# Altium PCB PCB1.PcbDoc
Units mil, origin at the board's own origin, x right, y up, seen from the top; angles counter-clockwise.
Board outline 6000 x 4000 mil, 2 copper layers (Top Layer, Bottom Layer); 240 components, 205 nets, 755 pads, 0 vias.
Unrouted connection lines stored in the file: 517.
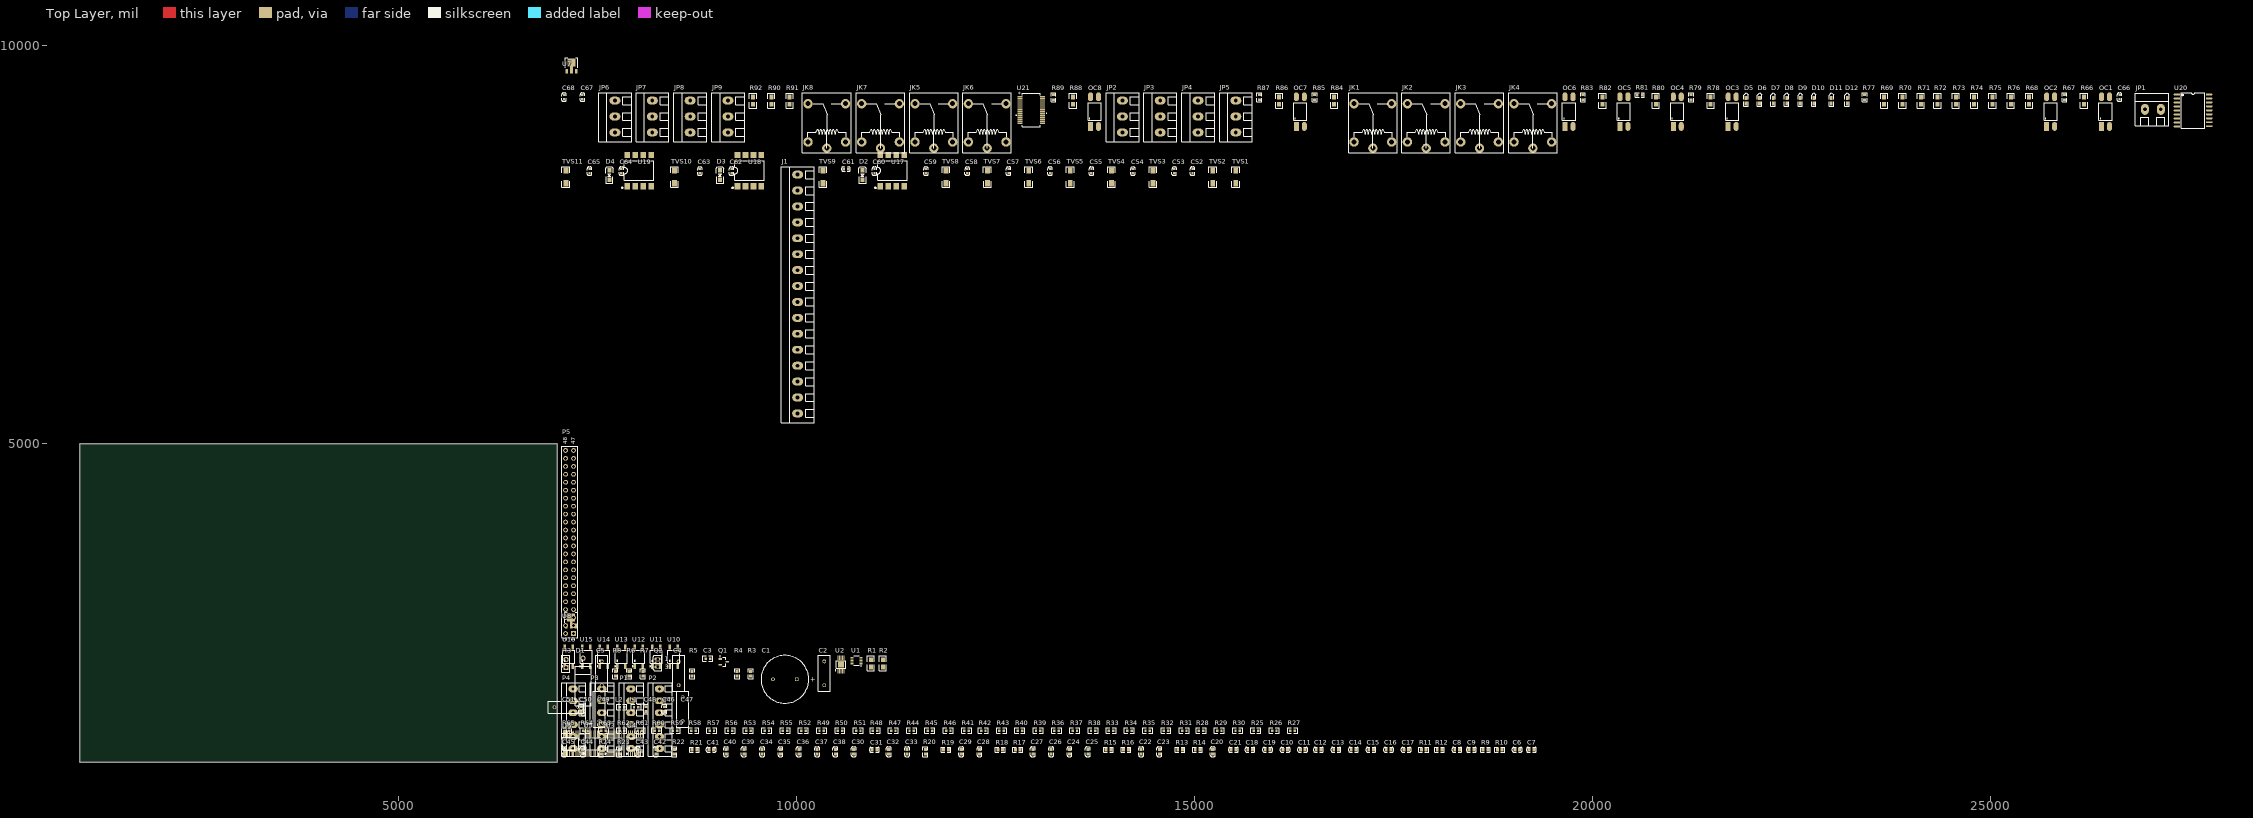
[diagram p0: Top Layer view]
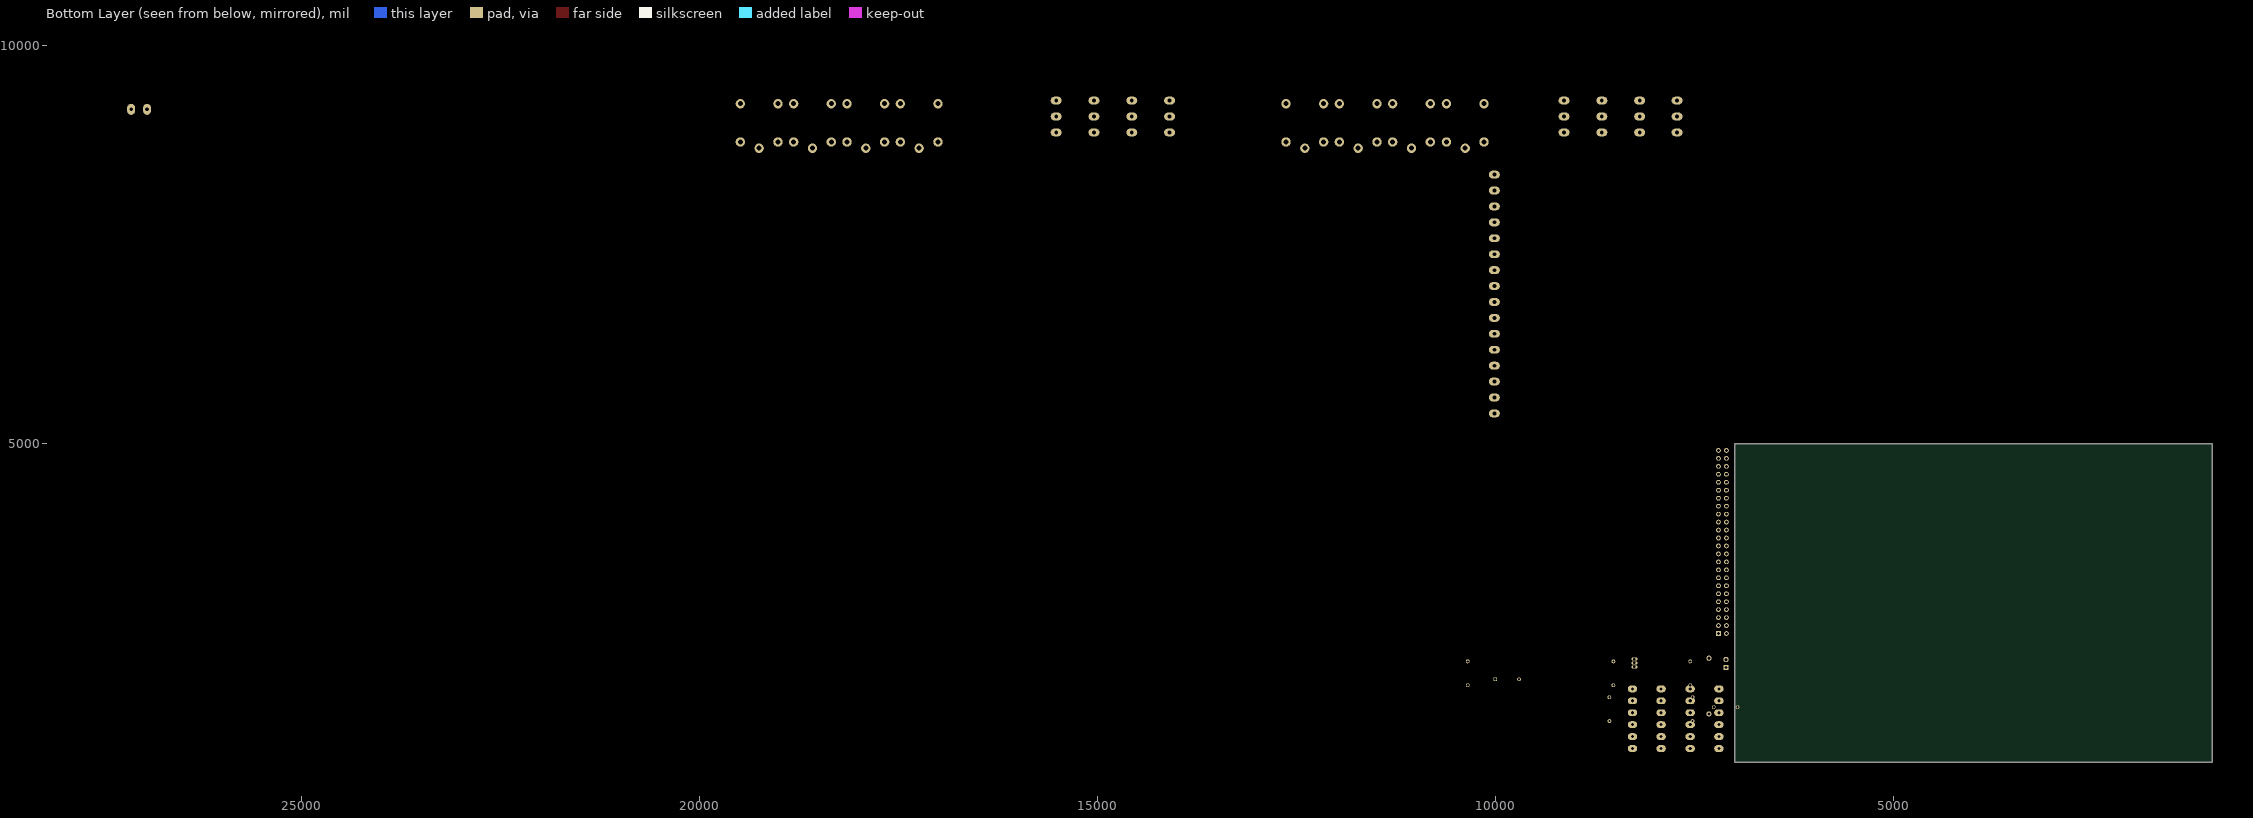
[diagram p1: Bottom Layer view, seen from below]

## Layer stack, top to bottom
Top Solder: solder mask 0.4, Solder Resist, Dk 3.5
Top Layer: signal copper 1.4
Dielectric 1: dielectric 12.6, FR-4, Dk 4.8
Bottom Layer: signal copper 1.4
Bottom Solder: solder mask 0.4, Solder Resist, Dk 3.5

## Board outline
1000,1000 7000,1000 7000,5000 1000,5000

## Design rules (kind name [scope] priority, off if disabled: settings)
Clearance [All] p1: gap=10 ignorepadtopadclearanceinfootprint=FALSE except(0: Arc-Hole Track-Hole SMDPad-Hole THPad-Hole Via-Hole Fill-Hole Poly-Hole Region-Hole Text-Hole)
PolygonConnect [All] p1: connectstyle=Relief reliefconductorwidth=10 reliefentries=4 polygonreliefangle="90 Angle" airgapwidth=10
RoomDefinition Power [InComponentClass('Power')] p1: confinementstyle=ConfineIn formatcopy=TRUE lockcomponents=FALSE outline 7045,9570 7190,9570 7190,9815 7045,9815
RoomDefinition DOut [InComponentClass('DOut')] p2: confinementstyle=ConfineIn formatcopy=TRUE lockcomponents=FALSE outline 7045,8640 27805,8640 27805,9520 7045,9520
RoomDefinition DIn [InComponentClass('DIn')] p3: confinementstyle=ConfineIn formatcopy=TRUE lockcomponents=FALSE outline 7045,5250 15695,5250 15695,8590 7045,8590
RoomDefinition Connect [InComponentClass('Connect')] p4: confinementstyle=ConfineIn formatcopy=TRUE lockcomponents=FALSE outline 7045,2500 7265,2500 7265,5195 7045,5195
RoomDefinition AD_DA [InComponentClass('AD_DA')] p5: confinementstyle=ConfineIn formatcopy=TRUE lockcomponents=FALSE outline 7045,1560 11165,1560 11165,2450 7045,2450
RoomDefinition AD7799 [InComponentClass('AD7799')] p6: confinementstyle=ConfineIn formatcopy=TRUE lockcomponents=FALSE outline 7045,1055 8100,1055 8100,1510 7045,1510
RoutingVias [All] p1: holewidth=28 width=50 viastyle="Through Hole" minholewidth=28 minwidth=50 maxholewidth=28 maxwidth=50
SolderMaskExpansion [All] p1: expansion=4 istentingtop=FALSE
Width [All] p1: maxlimit=10 minlimit=10 preferedwidth=10
30 further rules are at their usual default settings.

## Classes and differential pairs
component class Power: C46 C47 C48 C49 C50 C51 L1 L2 U7 U8
component class DOut: C66 C67 C68 D5 D6 D7 D8 D9 D10 D11 D12 JK1 JK2 JK3 JK4 JK5 JK6 JK7 JK8 JP1 JP2 JP3 JP4 JP5 JP6 JP7 JP8 JP9 OC1 OC2 OC3 OC4 OC5 OC6 OC7 OC8 R66 R67 R68 R69 R70 R71 R72 R73 R74 R75 R76 R77 R78 R79 R80 R81 R82 R83 R84 R85 R86 R87 R88 R89 R90 R91 R92 U20 U21
component class DIn: C52 C53 C54 C55 C56 C57 C58 C59 C60 C61 C62 C63 C64 C65 D2 D3 D4 J1 R25 R26 R27 R28 R29 R30 R31 R32 R33 R34 R35 R36 R37 R38 R39 R40 R41 R42 R43 R44 R45 R46 R47 R48 R49 R50 R51 R52 R53 R54 R55 R56 R57 R58 R59 R60 R61 R62 R63 R64 R65 TVS1 TVS2 TVS3 TVS4 TVS5 TVS6 TVS7 TVS8 TVS9 TVS10 TVS11 U9 U10 U11 U12 U13 U14 U15 U16 U17 U18 U19
component class Connect: P5
component class AD_DA: C1 C2 C3 C4 C5 D1 H3 Q1 Q2 R1 R2 R3 R4 R5 R6 R7 R8 U1 U2
component class AD7799: C6 C7 C8 C9 C10 C11 C12 C13 C14 C15 C16 C17 C18 C19 C20 C21 C22 C23 C24 C25 C26 C27 C28 C29 C30 C31 C32 C33 C34 C35 C36 C37 C38 C39 C40 C41 C42 C43 C44 C45 P1 P2 P3 P4 R9 R10 R11 R12 R13 R14 R15 R16 R17 R18 R19 R20 R21 R22 R23 R24 U3 U4 U5 U6

## Components (designator, comment, footprint, x,y, rotation, side; value= is the part's Value field where it differs from the comment)
C1 "10uf/30V" RB7.6-15 9860,2040 r0 top value=100pF
C2 "104" RAD-0.3 10355,2115 r90 top value=100pF
C3 "130nF" 0603 8865,2300 r0 top
C4 "IUF" RAD-0.3 8525,2115 r90 top value=100pF
C5 "10NF" RAD-0.3 7560,2115 r90 top value=100pF
C6 "CAP" 0603_C 19060,1155 r0 top
C7 "CAP" 0603_C 19240,1155 r0 top
C8 "100nF" 0603_C 18305,1155 r0 top
C9 "100nF" 0603_C 18485,1155 r0 top
C10 "100nF" 0603_C 16145,1155 r0 top
C11 "100nF" 0603_C 16365,1155 r0 top
C12 "100nF" 0603_C 16565,1155 r0 top
C13 "100nF" 0603_C 16785,1155 r0 top
C14 "100nF" 0603_C 17005,1155 r0 top
C15 "100nF" 0603_C 17225,1155 r0 top
C16 "100nF" 0603_C 17445,1155 r0 top
C17 "100nF" 0603_C 17665,1155 r0 top
C18 "CAP" 0603_C 15705,1155 r0 top
C19 "CAP" 0603_C 15925,1155 r0 top
C20 "CAP" 0603_C 15235,1130 r90 top
C21 "CAP" 0603_C 15495,1155 r0 top
C22 "100nF" 0603_C 14335,1130 r90 top
C23 "100nF" 0603_C 14565,1130 r90 top
C24 "CAP" 0603_C 13435,1130 r90 top
C25 "CAP" 0603_C 13665,1130 r90 top
C26 "CAP" 0603_C 13205,1130 r90 top
C27 "CAP" 0603_C 12975,1130 r90 top
C28 "100nF" 0603_C 12305,1130 r90 top
C29 "100nF" 0603_C 12075,1130 r90 top
C30 "100nF" 0603_C 10725,1130 r90 top
C31 "100nF" 0603_C 10985,1155 r0 top
C32 "100nF" 0603_C 11165,1130 r90 top
C33 "100nF" 0603_C 11395,1130 r90 top
C34 "CAP" 0603_C 9575,1130 r90 top
C35 "100nF" 0603_C 9805,1130 r90 top
C36 "100nF" 0603_C 10035,1130 r90 top
C37 "100nF" 0603_C 10265,1130 r90 top
C38 "100nF" 0603_C 10495,1130 r90 top
C39 "CAP" 0603_C 9345,1130 r90 top
C40 "CAP" 0603_C 9120,1130 r90 top
C41 "CAP" 0603_C 8935,1155 r0 top
C42 "100nF" 0603_C 8240,1130 r90 top
C43 "100nF" 0603_C 8010,1130 r90 top
C44 "CAP" 0603_C 7320,1130 r90 top
C45 "CAP" 0603_C 7090,1130 r90 top
C46 "6.3V 470uF" 0603_C 8345,1665 r90 top
C47 "104" RAD-0.3 8575,1665 r90 top value=100pF
C48 "6.3V 470uF" 0603_C 8115,1665 r90 top
C49 "104" RAD-0.3 7530,1665 r90 top value=100pF
C50 "6.3V 470uF" 0603_C 7300,1665 r90 top
C51 "104" RAD-0.3 7115,1690 r0 top value=100pF
C52 "100nF" 0603C 14980,8395 r90 top value=104
C53 "100nF" 0603C 14750,8395 r90 top value=104
C54 "100nF" 0603C 14230,8395 r90 top value=104
C55 "100nF" 0603C 13710,8395 r90 top value=104
C56 "100nF" 0603C 13190,8395 r90 top value=104
C57 "100nF" 0603C 12670,8395 r90 top value=104
C58 "100nF" 0603C 12150,8395 r90 top value=104
C59 "100nF" 0603C 11630,8395 r90 top value=104
C60 "100nF" 0603C 10985,8395 r90 top value=104
C61 "100nF" 0603C 10600,8450 r0 top value=104
C62 "100nF" 0603C 9190,8395 r90 top value=104
C63 "100nF" 0603C 8790,8395 r90 top value=104
C64 "100nF" 0603C 7805,8395 r90 top value=104
C65 "100nF" 0603C 7405,8395 r90 top value=104
C66 "100nF" 0603C 26625,9325 r90 top value=104
C67 "100nF" 0603C 7315,9325 r90 top value=104
C68 "100nF" 0603C 7085,9325 r90 top value=104
D1 "SS14" DIODE-0.7 7325,1955 r90 top
D2 "DIODE" 贴片二极管 10835,8315 r90 top
D3 "DIODE" 贴片二极管 9045,8315 r90 top
D4 "DIODE" 贴片二极管 7655,8315 r90 top
D5 "LED" LED-0603G 21935,9275 r90 top
D6 "LED" LED-0603G 22105,9275 r90 top
D7 "LED" LED-0603G 22275,9275 r90 top
D8 "LED" LED-0603G 22445,9275 r90 top
D9 "LED" LED-0603G 22615,9275 r90 top
D10 "LED" LED-0603G 22785,9275 r90 top
D11 "LED" LED-0603G 23005,9275 r90 top
D12 "LED" LED-0603G 23205,9275 r90 top
H3 "KH-2.54PH180-1X2P-L11.5" 1*2P 7160,2130 r90 top
J1 "PIN16" KF128-5.08-16P 10020,6880 r90 top
JK1 "SRD-05VDC-SL-C" SRD-C_B 17010,8790 r90 top
JK2 "SRD-05VDC-SL-C" SRD-C_B 17680,8790 r90 top
JK3 "SRD-05VDC-SL-C" SRD-C_B 18350,8790 r90 top
JK4 "SRD-05VDC-SL-C" SRD-C_B 19020,8790 r90 top
JK5 "SRD-05VDC-SL-C" SRD-C_B 11495,8790 r90 top
JK6 "SRD-05VDC-SL-C" SRD-C_B 12165,8790 r90 top
JK7 "SRD-05VDC-SL-C" SRD-C_B 10825,8790 r90 top
JK8 "SRD-05VDC-SL-C" SRD-C_B 10150,8790 r90 top
JP1 "HF9500*2" KF128-5.08-2P 26945,9200 r0 top
JP2 "KF128-5.08-3P" KF128-5.08-3P 14100,8910 r90 top
JP3 "KF128-5.08-3P" KF128-5.08-3P 14575,8910 r90 top
JP4 "KF128-5.08-3P" KF128-5.08-3P 15050,8910 r90 top
JP5 "KF128-5.08-3P" KF128-5.08-3P 15525,8910 r90 top
JP6 "KF128-5.08-3P" KF128-5.08-3P 7725,8910 r90 top
JP7 "KF128-5.08-3P" KF128-5.08-3P 8195,8910 r90 top
JP8 "KF128-5.08-3P" KF128-5.08-3P 8670,8910 r90 top
JP9 "KF128-5.08-3P" KF128-5.08-3P 9145,8910 r90 top
L1 "60R" 0603 7965,1690 r0 top
L2 "60R" 0603 7785,1690 r0 top
OC1 "EL817A" SMD_PC817 26400,8985 r90 top
OC2 "EL817A" SMD_PC817 25710,8985 r90 top
OC3 "EL817A" SMD_PC817 21710,8985 r90 top
OC4 "EL817A" SMD_PC817 21020,8985 r90 top
OC5 "EL817A" SMD_PC817 20350,8985 r90 top
OC6 "EL817A" SMD_PC817 19660,8985 r90 top
OC7 "EL817A" SMD_PC817 16285,8985 r90 top
OC8 "EL817A" SMD_PC817 13700,8985 r90 top
P1 "CON6" KF128-3.81-6P 7925,1545 r90 top
P2 "CON6" KF128-3.81-6P 8285,1545 r90 top
P3 "CON6" KF128-3.81-6P 7560,1545 r90 top
P4 "CON6" KF128-3.81-6P 7200,1545 r90 top
P5 "Header 24X2" HDR2X24 7205,2615 r90 top
Q1 "SS8550" SOT-23B_N 9090,2260 r0 top
Q2 "SI2309" E3 8260,2245 r0 top
R1 "500R" 0805R 10940,2185 r90 top value=1K
R2 "500R" 0805R 11090,2185 r90 top value=1K
R3 "15R" 0603_R 9430,2110 r90 top value=1K
R4 "10K" 0603_R 9260,2110 r90 top value=1K
R5 "5.6K/1%" 0603_R 8695,2110 r90 top value=1K
R6 "8.2K/1%" 0603_R 7905,2110 r90 top value=1K
R7 "2K/1%" 0603_R 8075,2110 r90 top value=1K
R8 "15R" 0603_R 7730,2110 r90 top value=1K
R9 "0R" 0603_R 18660,1155 r0 top
R10 "0R" 0603_R 18840,1155 r0 top
R11 "0R" 0603_R 17885,1155 r0 top
R12 "0R" 0603_R 18085,1155 r0 top
R13 "0R" 0603_R 14825,1155 r0 top
R14 "0R" 0603_R 15045,1155 r0 top
R15 "0R" 0603_R 13925,1155 r0 top
R16 "0R" 0603_R 14145,1155 r0 top
R17 "0R" 0603_R 12785,1155 r0 top
R18 "0R" 0603_R 12565,1155 r0 top
R19 "0R" 0603_R 11885,1155 r0 top
R20 "0R" 0603_R 11625,1130 r90 top
R21 "0R" 0603_R 8725,1155 r0 top
R22 "0R" 0603_R 8470,1130 r90 top
R23 "0R" 0603_R 7780,1130 r90 top
R24 "0R" 0603_R 7550,1130 r90 top
R25 "10K" 0603 15750,1395 r0 top
R26 "10K" 0603 15980,1395 r0 top
R27 "10K" 0603 16210,1395 r0 top
R28 "10K" 0603 15060,1395 r0 top
R29 "10K" 0603 15290,1395 r0 top
R30 "10K" 0603 15520,1395 r0 top
R31 "10K" 0603 14850,1395 r0 top
R32 "10K" 0603 14620,1395 r0 top
R33 "10K" 0603 13930,1395 r0 top
R34 "10K" 0603 14160,1395 r0 top
R35 "10K" 0603 14390,1395 r0 top
R36 "10K" 0603 13245,1395 r0 top
R37 "10K" 0603 13475,1395 r0 top
R38 "10K" 0603 13705,1395 r0 top
R39 "10K" 0603 13015,1395 r0 top
R40 "10K" 0603 12785,1395 r0 top
R41 "10K" 0603 12115,1395 r0 top
R42 "10K" 0603 12325,1395 r0 top
R43 "10K" 0603 12555,1395 r0 top
R44 "10K" 0603 11425,1395 r0 top
R45 "10K" 0603 11655,1395 r0 top
R46 "10K" 0603 11885,1395 r0 top
R47 "10K" 0603 11195,1395 r0 top
R48 "10K" 0603 10965,1395 r0 top
R49 "10K" 0603 10295,1395 r0 top
R50 "10K" 0603 10525,1395 r0 top
R51 "10K" 0603 10755,1395 r0 top
R52 "10K" 0603 10065,1395 r0 top
R53 "10K" 0603 9375,1395 r0 top
R54 "10K" 0603 9605,1395 r0 top
R55 "10K" 0603 9835,1395 r0 top
R56 "10K" 0603 9145,1395 r0 top
R57 "10K" 0603 8915,1395 r0 top
R58 "10K" 0603 8685,1395 r0 top
R59 "10K" 0603 8455,1395 r0 top
R60 "10K" 0603 8225,1395 r0 top
R61 "10K" 0603 8015,1395 r0 top
R62 "10K" 0603 7785,1395 r0 top
R63 "10K" 0603 7555,1395 r0 top
R64 "10K" 0603 7325,1395 r0 top
R65 "10K" 0603 7095,1395 r0 top
R66 "500R" 0805R 26180,9255 r90 top value=1K
R67 "4.7K" 0603R 25935,9320 r90 top value=1K
R68 "500R" 0805R 25490,9255 r90 top value=1K
R69 "680R" 0805R 23670,9255 r90 top value=1K
R70 "680R" 0805R 23900,9255 r90 top value=1K
R71 "680R" 0805R 24130,9255 r90 top value=1K
R72 "680R" 0805R 24340,9255 r90 top value=1K
R73 "680R" 0805R 24570,9255 r90 top value=1K
R74 "680R" 0805R 24800,9255 r90 top value=1K
R75 "680R" 0805R 25030,9255 r90 top value=1K
R76 "680R" 0805R 25260,9255 r90 top value=1K
R77 "4.7K" 0603R 23425,9320 r90 top value=1K
R78 "500R" 0805R 21490,9255 r90 top value=1K
R79 "4.7K" 0603R 21245,9320 r90 top value=1K
R80 "500R" 0805R 20800,9255 r90 top value=1K
R81 "4.7K" 0603R 20570,9380 r0 top value=1K
R82 "500R" 0805R 20130,9255 r90 top value=1K
R83 "4.7K" 0603R 19885,9320 r90 top value=1K
R84 "500R" 0805R 16760,9255 r90 top value=1K
R85 "4.7K" 0603R 16515,9320 r90 top value=1K
R86 "500R" 0805R 16070,9255 r90 top value=1K
R87 "4.7K" 0603R 15820,9320 r90 top value=1K
R88 "500R" 0805R 13480,9255 r90 top value=1K
R89 "4.7K" 0603R 13235,9320 r90 top value=1K
R90 "500R" 0805R 9690,9255 r90 top value=1K
R91 "500R" 0805R 9920,9255 r90 top value=1K
R92 "500R" 0805R 9460,9255 r90 top value=1K
TVS1 "TVS" TVS 15475,8220 r90 top
TVS2 "TVS" TVS 15185,8220 r90 top
TVS3 "TVS" TVS 14435,8220 r90 top
TVS4 "TVS" TVS 13915,8220 r90 top
TVS5 "TVS" TVS 13395,8220 r90 top
TVS6 "TVS" TVS 12875,8220 r90 top
TVS7 "TVS" TVS 12355,8220 r90 top
TVS8 "TVS" TVS 11835,8220 r90 top
TVS9 "TVS" TVS 10290,8220 r90 top
TVS10 "TVS" TVS 8425,8220 r90 top
TVS11 "TVS" TVS 7060,8220 r90 top
U1 "MCP4725" MCP4725 10705,2220 r0 top
U2 "XTR111" XTR111 10495,2155 r0 top
U3 "AD7799" TSSOP16 7625,1105 r90 top
U4 "AD7799" TSSOP16 7895,1105 r90 top
U5 "AD7799" TSSOP16 7350,1105 r90 top
U6 "AD7799" TSSOP16 7080,1105 r90 top
U7 "HT7533-1" SOT89 7120,9680 r0 top
U8 "HT7533-1" SOT89 7115,2710 r0 top
U9 "IS181GB" TLP181 7225,1150 r90 top
U10 "IS181GB" TLP181 8545,2245 r90 top
U11 "IS181GB" TLP181 8325,2245 r90 top
U12 "IS181GB" TLP181 8105,2245 r90 top
U13 "IS181GB" TLP181 7885,2245 r90 top
U14 "IS181GB" TLP181 7665,2245 r90 top
U15 "IS181GB" TLP181 7445,2245 r90 top
U16 "IS181GB" TLP181 7225,2245 r90 top
U17 "PS8601" SMD-8_6.3mm 11210,8430 r0 top
U18 "PS8601" SMD-8_6.3mm 9415,8430 r0 top
U19 "PS8601" SMD-8_6.3mm 8030,8430 r0 top
U20 "ULN2803A" "SOP18 - 300mil" 27345,9385 r0 top
U21 "MCP23017-E/SS" SSOP28_MC_MCH 12955,9190 r0 top

## Footprints (in the part's own frame and the unit in brackets; to place one, negate y for a bottom-side part, rotate by r counter-clockwise, add the part's x,y. Pads: shape width x height; smd on the part's side, far side on the other; paste and mask are expansions set on the pad)
1*2P [mm]
  rect 1.7x1.7 hole 1.1: 1(1.48,1.27)
  round 1.7 hole 1.1: 2(4.02,1.27)
  silkscreen extent 0,0 5.33,2.54
0603 [mil]
  rect 30x30 smd: 1(0,0) 2(55,0)
  silkscreen extent -35,-35 90,35
0603_C [mm]
  rect 0.93x0.98 smd: 1(-0.77,0) 2(0.77,0)
  silkscreen extent -1.53,-0.79 1.54,0.79, body extent -0.8,-0.4 0.8,0.4, height 0.3
0603_R [mm]
  rect 0.93x0.98 smd: 1(-0.77,0) 2(0.77,0)
  silkscreen extent -1.53,-0.79 1.54,0.79, body extent -0.85,-0.4 0.85,0.4, height 0.56
0603C [mil]
  rect 30x30 smd: 1(0.21,-0.35) 2(55.21,-1.35)
  silkscreen extent -26,-30 81,28, body extent -1,-15 62,17, height 12
0603R [mm]
  rect 0.8x0.965 smd: 1(0,0) 2(1.6,0)
  silkscreen extent -0.64,-0.76 2.21,0.76, body extent -0.04,-0.41 1.56,0.41, height 0.45
0805R [mil]
  rect 60x50 smd: 1(10,0) 2(100,0)
  silkscreen extent -40,-45 150,45, body extent 11,-25 90,25, height 15
DIODE-0.7 [mm] "Diode, Thru-Hole; 2 Leads; 0.7 in Pin Spacing"
  round 1.65 hole 1: 1(-8.89,0) 2(8.89,0)
  silkscreen extent -7.37,-2.54 7.37,2.54
E3 [mm] "TO, Flat Index; 3 In-Line, Axial Leads; Body Dia. 4.6mm; Lead Dia. 0.5 mm (max)"
  oval 2x1 hole 0.8: 1(0,1.27) 2(0,0) 3(0,-1.27)
  silkscreen extent -1.41,-2.41 1.41,2.41
HDR2X24 [mm] "Connector; Header; 24x2 Position"
  rect 1.5x1.5 hole 0.9: 1(0,0)
  round 1.5 hole 0.9: 2(0,2.54) 3(2.54,0) 4(2.54,2.54) 5(5.08,0) 6(5.08,2.54) 7(7.62,0) 8(7.62,2.54) 9(10.16,0) 10(10.16,2.54) 11(12.7,0) 12(12.7,2.54) 13(15.24,0) 14(15.24,2.54) 15(17.78,0) 16(17.78,2.54) 17(20.32,0) 18(20.32,2.54) 19(22.86,0) 20(22.86,2.54) 21(25.4,0) 22(25.4,2.54) 23(27.94,0) 24(27.94,2.54) 25(30.48,0) 26(30.48,2.54) 27(33.02,0) 28(33.02,2.54) 29(35.56,0) 30(35.56,2.54) 31(38.1,0) 32(38.1,2.54) 33(40.64,0) 34(40.64,2.54) 35(43.18,0) 36(43.18,2.54) 37(45.72,0) 38(45.72,2.54) 39(48.26,0) 40(48.26,2.54) 41(50.8,0) 42(50.8,2.54) 43(53.34,0) 44(53.34,2.54) 45(55.88,0) 46(55.88,2.54) 47(58.42,0) 48(58.42,2.54)
  silkscreen extent -1.27,-1.27 59.69,3.81
KF128-3.81-6P [mm] "螺钉式接线端子，脚距3.81mm"
  oval 2.2x3 hole 1: 1(-9.525,0) 2(-5.715,0) 3(-1.905,0) 4(1.905,0) 5(5.715,0) 6(9.525,0)
  silkscreen extent -11.94,-4.04 11.43,3.63, body extent -11.93,-3.9 11.43,3.5, height 8.55
KF128-5.08-2P [mm]
  oval 2.5x3.5 hole 1.2: 1(0,0) 2(5.08,0)
  silkscreen extent -3.05,-5.31 7.62,5.21, body extent -3.05,-5.38 7.61,5.12, height 14.15
KF128-5.08-3P [mm]
  oval 2.5x3.5 hole 1.2: 1(0,0) 2(5.08,0) 3(10.16,0)
  silkscreen extent -3.05,-5.31 12.7,5.21, body extent -3.05,-5.38 12.69,5.12, height 14.15
KF128-5.08-16P [mm]
  oval 2.5x3.5 hole 1.2: 1(-38.1,0) 2(-33.02,0) 3(-27.94,0) 4(-22.86,0) 5(-17.78,0) 6(-12.7,0) 7(-7.62,0) 8(-2.54,0) 9(2.54,0) 10(7.62,0) 11(12.7,0) 12(17.78,0) 13(22.86,0) 14(27.94,0) 15(33.02,0) 16(38.1,0)
  silkscreen extent -41.15,-5.31 40.64,5.21, body extent -41.14,-5.3 40.64,5.2, height 14.15
LED-0603G [mil]
  rect 50x35 smd: 1(0,0.26) 2(70,0.26)
  silkscreen extent -36,-28 134,28, body extent 4,-15 66,17, height 24
MCP4725 [mm]
  rect 1x0.55 smd: 1(2.792,0.447) 2(2.792,1.397) 3(2.792,2.347) 4(-0.008,2.347) 5(-0.008,1.397) 6(-0.008,0.447)
  silkscreen extent 0.49,-0.38 2.92,2.95
RAD-0.3 [mm] "Radial Cap, Thru-Hole; 2 Leads; 0.3 in Pin Spacing"
  round 1.2 hole 0.7: 1(-3.81,0) 2(3.81,0)
  silkscreen extent -5.71,-1.91 5.71,1.91
RB7.6-15 [mm] "Polarized Capacitor (Radial); 2 Leads"
  rect 1.2x1.2 hole 0.7: 1(3.81,0)
  round 1.2 hole 0.7: 2(-3.81,0)
  silkscreen extent -7.62,-7.62 7.62,7.62
SMD-8_6.3mm [mm]
  rect 1.8x2 smd: 1(-3.81,-4.95) 2(-1.27,-4.95) 3(1.27,-4.95) 4(3.81,-4.95) 5(3.81,4.95) 6(1.27,4.95) 7(-1.27,4.95) 8(-3.81,4.95)
  silkscreen extent -5.6,-5.7 4.7,3.1
SMD_PC817 [mm]
  rect 2.8x1.6 smd mask+0: 1(0,0)
  oval 2.8x1.6 smd mask+0: 2(0,-2.54) 3(9.452,-2.54) 4(9.452,0)
  silkscreen extent 2.03,-3.36 7.49,0.82, body extent -0.3,-3.56 9.7,1.02, height 3.85
"SOP18 - 300mil" [mm]
  oval 2.1x0.6 smd: 1(0.046,0) 2(0.046,-1.27) 3(0.046,-2.54) 4(0.046,-3.81) 5(0.046,-5.08) 6(0.046,-6.35) 7(0.046,-7.62) 8(0.046,-8.89) 9(0.046,-10.16) 10(10.317,-10.109) 11(10.317,-8.839) 12(10.317,-7.569) 13(10.317,-6.299) 14(10.317,-5.029) 15(10.317,-3.759) 16(10.317,-2.489) 17(10.317,-1.219) 18(10.317,0.051)
  silkscreen extent 1.4,-10.72 8.9,0.56
SOT89 [mil]
  rect 34x59.05 smd: 1(0,0) 3(120,0)
  rect 98.42x98.42 smd: 2(59.06,106.3)
  rect 34x100 smd: 2(60,20)
  silkscreen extent -20,40 140,170
SOT-23B_N [mm] "SOT23, 3-Leads, Body 2.9x1.3mm, Pitch 0.95mm, Lead Span 2.4mm, IPC Medium Density"
  rect 1.15x0.6 smd: 1(-1.125,0.95) 2(-1.125,-0.95) 3(1.125,0)
  silkscreen extent -1.25,-1.5 0.7,1.92, body extent -0.7,-1.5 0.7,1.5, height 1.14
SRD-C_B [mm]
  round 3 hole 1.6: 1(0,0) 2(0,-12) 3(-2,-6) 4(12.2,0) 5(12.2,-12)
  silkscreen extent -3.4,-13.75 15.7,1.75, body extent -3.33,-13.85 15.77,1.65, height 15.6
SSOP28_MC_MCH [mil]
  rect 65.18x17 smd paste+0 mask+0: 1(-142.83,166.34) 2(-142.83,140.75) 3(-142.83,115.16) 4(-142.83,89.57) 5(-142.83,63.98) 6(-142.83,38.39) 7(-142.83,12.8) 8(-142.83,-12.8) 9(-142.83,-38.39) 10(-142.83,-63.98) 11(-142.83,-89.57) 12(-142.83,-115.16) 13(-142.83,-140.75) 14(-142.83,-166.34) 15(142.83,-166.34) 16(142.83,-140.75) 17(142.83,-115.16) 18(142.83,-89.57) 19(142.83,-63.98) 20(142.83,-38.39) 21(142.83,-12.8) 22(142.83,12.8) 23(142.83,38.39) 24(142.83,63.98) 25(142.83,89.57) 26(142.83,115.16) 27(142.83,140.75) 28(142.83,166.34)
  silkscreen extent -195,-212 195,212, body extent -161,-207 161,207, height 79
TLP181 [mm]
  rect 1.56x0.8 smd: 1(-1.062,3.297) 2(-1.062,0.757) 3(5.098,0.757) 4(5.098,3.297)
  silkscreen extent -1.21,0.08 4.09,4.18
TSSOP16 [mm]
  rect 2x0.28 smd: 1(0,0) 2(0,-0.65) 3(0,-1.3) 4(0,-1.95) 5(0,-2.6) 6(0,-3.25) 7(0,-3.9) 8(0,-4.55) 9(6.4,-4.55) 10(6.4,-3.9) 11(6.4,-3.25) 12(6.4,-2.6) 13(6.4,-1.95) 14(6.4,-1.3) 15(6.4,-0.65) 16(6.4,0)
  silkscreen extent -0.3,-4.87 5.06,0.6
TVS [mil]
  rect 80x60 smd: 1(212,-49) 2(49.56,-49.51)
  silkscreen extent 0,-97 260,1
XTR111 [mm]
  rect 0.3x1.45 smd: 1(0.773,-0.418) 2(1.273,-0.418) 3(1.773,-0.418) 4(2.273,-0.418) 5(2.774,-0.418) 6(2.774,3.984) 7(2.273,3.984) 8(1.773,3.984) 9(1.273,3.984) 10(0.773,3.984)
  rect 1.89x1.83 smd: 11(1.772,1.783)
  silkscreen extent -0.13,-0.12 3.27,2.98
贴片二极管 [mil]
  rect 60x50 smd: 1(120,0) 2(0,0)
  silkscreen extent -42,-46 162,47

## Part data
C1: library part "Cap Pol1", "Polarized Capacitor (Radial)", LatestRevisionDate=17-Jul-2002, LatestRevisionNote="Re-released for DXP Platform.", PackageDescription="Polarized Capacitor (Radial); 2 Leads", PackageReference=RB7.6-15, Published=8-Jun-2000, Publisher="Altium Limited"
C2 C4 C5: library part Cap, "Capacitor", LatestRevisionDate=17-Jul-2002, LatestRevisionNote="Re-released for DXP Platform.", PackageDescription="Radial Cap, Thru-Hole; 2 Leads; 0.3 in Pin Spacing", PackageReference=RAD-0.3, Published=8-Jun-2000, Publisher="Altium Limited"
C3: library part "Cap Smd", "Capacitor"
C6 C7 C18 C19 C20 C21 C24 C25 C26 C27 C34 C39 C40 C41 C44 C45: "Capacitor"
C8 C9 C10 C11 C12 C13 C14 C15 C16 C17 C22 C23 C28 C29 C30 C31 C32 C33 C35 C36 C37 C38 C42 C43 C47 C49 C51 C52 C53 C54 C55 C56 C57 C58 C59 C60 C61 C62 C63 C64 C65 C66 C67 C68: library part CAP, "Capacitor"
  C47 C49 C51: LatestRevisionDate=17-Jul-2002, LatestRevisionNote="Re-released for DXP Platform.", PackageDescription="Radial Cap, Thru-Hole; 2 Leads; 0.3 in Pin Spacing", PackageReference=RAD-0.3, Published=8-Jun-2000, Publisher="Altium Limited"
  C52 C53 C54 C55 C56 C57 C58 C59 C60 C61 C62 C63 C64 C65 C66 C67 C68: LatestRevisionDate=17-Jul-2002, LatestRevisionNote="Re-released for DXP Platform.", PackageReference=RAD-0.3, Published=8-Jun-2000, Publisher="Altium Limited"
C46 C48 C50: library part ELECTRO1, "Electrolytic Capacitor"
D1: library part "D Zener", "Zener Diode", LatestRevisionDate=17-Jul-2002, LatestRevisionNote="Re-released for DXP Platform.", PackageDescription="Diode, Thru-Hole; 2 Leads; 0.7 in Pin Spacing", PackageReference=DIODE-0.7, Published=8-Jun-2000, Publisher="Altium Limited"
D2 D3 D4: "Diode"
D5 D6 D7 D8 D9 D10 D11 D12: "LED 发光二极管"
H3: BOM_Manufacturer=kinghelm(金航标), BOM_Manufacturer Part=KH-2.54PH180-1X4P-L11.5, BOM_Supplier=LCSC, BOM_Supplier Part=C2905435, Contributor=LCSC, spicePre=H, spiceSymbolName=KH-2.54PH180-1X4P-L11.5
JK1 JK2 JK3 JK4 JK5 JK6 JK7 JK8: "5V一组转换"
JP1: library part "HEADER 2"
JP2 JP3 JP4 JP5 JP6 JP7 JP8 JP9: library part "HEADER 3"
L1 L2: library part FUSE1, "Fuse"
OC1 OC2 OC3 OC4 OC5 OC6 OC7 OC8: library part EL357N, "线性光耦"
P1 P2 P3 P4: "Connector"
P5: "Header, 24-Pin, Dual row", LatestRevisionDate=17-Jul-2002, LatestRevisionNote="Re-released for DXP Platform.", Publisher="Altium Limited"
Q1: library part PNP, "PNP Bipolar Transistor", LatestRevisionDate=29-May-2009, LatestRevisionNote="IPC-7351 Footprint Added.", PackageDescription="3-Pin SOT-23 Package 0.95 mm Pitch, 2.4 mm Lead Span", PackageReference=SOT-23B, PackageVersion=Aug-1999, Published=8-Jun-2000, Publisher="Altium Limited"
Q2: library part MOSFET-P, "P-Channel MOSFET", LatestRevisionDate=17-Jul-2002, LatestRevisionNote="Re-released for DXP Platform.", PackageDescription="TO, Flat Index; 3 In-Line, Axial Leads; Body Dia. 4.6mm; Lead Dia. 0.5 mm (max)", PackageReference=E3, PackageVersion=1995/1996, Published=8-Jun-2000, Publisher="Altium Limited"
R1 R2 R66 R67 R68 R69 R70 R71 R72 R73 R74 R75 R76 R77 R78 R79 R80 R81 R82 R83 R84 R85 R86 R87 R88 R89 R90 R91 R92: library part RES, "Resistor", Published=8-Jun-2000, Publisher="Altium Limited", Revision="July-2002: Re-released for DXP Platform."
R3 R4 R5 R6 R7 R8: library part Res2, "Resistor", LatestRevisionDate=17-Jul-2002, LatestRevisionNote="Re-released for DXP Platform.", PackageDescription="Axial Device, Thru-Hole; 2 Leads; 0.4 in Pin Spacing", PackageReference=AXIAL-0.4, Published=8-Jun-2000, Publisher="Altium Limited"
R9 R10 R11 R12 R13 R14 R15 R16 R17 R18 R19 R20 R21 R22 R23 R24 R25 R26 R27 R28 R29 R30 R31 R32 R33 R34 R35 R36 R37 R38 R39 R40 R41 R42 R43 R44 R45 R46 R47 R48 R49 R50 R51 R52 R53 R54 R55 R56 R57 R58 R59 R60 R61 R62 R63 R64 R65: library part RES1
U1: library part MCP4725A0T-E/CH, BOM_JLCPCB Part Class="Extended Part", BOM_Manufacturer=MICROCHIP, BOM_Manufacturer Part=MCP4725A0T-E/CH, BOM_Supplier=LCSC, BOM_Supplier Part=C144198, Contributor=LCSC, spicePre=U, spiceSymbolName=MCP4725A0T-E/CH
U9 U10 U11 U12 U13 U14 U15 U16: BOM_JLCPCB Part Class="Extended Part", BOM_Manufacturer=ISOCOM, BOM_Manufacturer Part=IS181GB, BOM_Supplier=LCSC, BOM_Supplier Part=C84196, spicePre=U, spiceSymbolName=IS181GB
U17 U18 U19: "High speed optocoupler"
U20: "8 channels Darlington"
U21: "No Description Available", Mfr_Name=Microchip, Copyright="Copyright (C) 2021 Ultra Librarian. All rights reserved.", Manufacturer_Part_Number=MCP23017-E/SS, RefDes=RefDes, Type=DEV

## Nets (pads, with @x,y where several pads share a name; then routed paths per layer and width w, separated by ;. In a path a pad name is that pad's centre, name@x,y a point inside that pad or via, vN(x,y) a via of type N, cw(c..) or ccw(c..) an arc to the next point about the centre after c; other vN are vias at no path point)
3V3: P5.48
4-20: H3.2 R8.2
5V: C46.1 C47.2 L1.1 P5.46 U7.2
+12_RELY: C66.2 JK1.2 JK2.2 JK3.2 JK4.2 JP1.2 OC1.4 OC2.4 OC3.4 OC4.4 OC5.4 OC6.4 OC7.4 OC8.4 R69.1 R70.1 R71.1 R72.1 R73.1 R74.1 R75.1 R76.1 U20.10
A: C61.1 D2.2 J1.11 R59.1 TVS9.1 U17.3
B: C63.1 D3.2 J1.12 R62.1 TVS10.1 U18.3
BGND: C6.2 C7.2 C11.2 C12.2 C13.2 C15.2 C16.2 C17.2 C18.2 C19.2 C20.2 C21.2 C24.2 C25.2 C26.2 C27.2 C31.2 C32.2 C33.2 C34.2 C36.2 C37.2 C38.2 C39.2 C40.2 C41.2 C44.2 C45.2 C49.2 C50.2 C51.1 L2.1 P1.4 P2.4 P3.4 P4.4 U3.10 U3.11 U4.10 U4.11 U5.10 U5.11 U6.10 U6.11 U8.1
BVCC: C11.1 C12.1 C13.1 C15.1 C16.1 C17.1 C31.1 C32.1 C33.1 C36.1 C37.1 C38.1 C50.1 C51.2 P1.3 P2.3 P3.3 P4.3 U3.9 U3.13 U4.9 U4.13 U5.9 U5.13 U6.9 U6.13 U8.3
COMX0: J1.15 R57.2 R60.2 R63.2 TVS9.2 TVS10.2 TVS11.2
DUL1: OC1.3 R67.1 U20.1
DUL2: OC2.3 R77.1 U20.2
DUL3: OC3.3 R79.1 U20.3
DUL4: OC4.3 R81.1 U20.4
DUL5: OC5.3 R83.1 U20.5
DUL6: OC6.3 R85.1 U20.6
DUL7: OC7.3 R87.1 U20.7
DUL8: OC8.3 R89.1 U20.8
ENET1_CRS_DV: P5.36 U18.6
ENET1_RXD0: P5.37 U17.6
ENET1_RXD1: P5.34 U19.6
ENET1_RXER: P5.41 U5.2
ENET1_TX_CLK: P5.40 U4.2
ENET1_TXD0: P5.32
ENET1_TXD1: P5.39
ENET1_TXEN: P5.38 U6.2
GND: C1.2 C2.1 C3.2 C4.1 C5.2 C10.2 C14.2 C30.2 C35.2 C46.2 C47.1 C48.2 C67.1 C68.1 H3.1 J1.14 L2.2 P5.47 R6.2 R7.1 U1.2 U1.6 U2.9 U2.10 U2.11 U3.12 U4.12 U5.12 U6.12 U7.1 U9.3 U10.3 U11.3 U12.3 U13.3 U14.3 U15.3 U16.3 U17.5 U18.5 U19.5 U21.10 U21.15 U21.16
GND_RELY: C66.1 JP1.1 R67.2 R77.2 R79.2 R81.2 R83.2 R85.2 R87.2 R89.2 U20.9
GPA0: OC1.2 U21.21
GPA1: OC2.2 U21.22
GPA2: OC3.2 U21.23
GPA3: OC4.2 U21.24
GPA4: OC5.2 U21.25
GPA5: OC6.2 U21.26
GPA6: OC7.2 U21.27
GPA7: OC8.2 U21.28
GPB0: R27.2 U9.4 U21.1
GPB1: R30.2 U10.4 U21.2
GPB2: R35.2 U11.4 U21.3
GPB3: R38.2 U12.4 U21.4
GPB4: R43.2 U13.4 U21.5
GPB5: R46.2 U14.4 U21.6
GPB6: R51.2 U15.4 U21.7
GPB7: R55.2 U16.4 U21.8
GPIO_1: P5.7
GPIO_2: P5.9
GPIO_4: P5.10
GPIO_6: P5.16
GPIO_7: P5.15
GPIO_8: P5.14
GPIO_9: P5.11
I2C1_SCL: R1.1 U1.5
I2C1_SDA: R2.1 U1.4
JTAG_MOD: P5.31
JTAG_nTRST: P5.30
JTAG_TCK: P5.28
JTAG_TDI: P5.26
JTAG_TDO: P5.27
JTAG_TMS: P5.29
M: C52.2 C53.1 C54.1 C55.1 C56.1 C57.1 C58.1 C59.1 J1.9 R31.1 R32.1 R39.1 R40.1 R47.1 R48.1 R52.1 R56.1 TVS1.1 TVS2.1 TVS3.1 TVS4.1 TVS5.1 TVS6.1 TVS7.1 TVS8.1 U9.2 U10.2 U11.2 U12.2 U13.2 U14.2 U15.2 U16.2
NC: U17.1 U17.4 U18.1 U18.4 U19.1 U19.4
NetC3_1: C3.1 R4.1 U2.6
NetC4_2: C4.2 R5.1 U2.5
NetC5_1: C5.1 D1.1 Q2.1 R8.1
NetC6_1: C6.1 C8.1 P1.1 R9.1
NetC7_1: C7.1 C9.1 P2.1 R10.1
NetC8_2: C8.2 C18.1 P1.2 R11.1
NetC9_2: C9.2 C19.1 P2.2 R12.1
NetC20_1: C20.1 C22.1 P1.5 R13.1
NetC21_1: C21.1 C23.1 P2.5 R14.1
NetC22_2: C22.2 C24.1 P1.6 R15.1
NetC23_2: C23.2 C25.1 P2.6 R16.1
NetC26_1: C26.1 C28.1 P3.1 R17.1
NetC27_1: C27.1 C29.1 P4.1 R18.1
NetC28_2: C28.2 C34.1 P3.2 R19.1
NetC29_2: C29.2 C39.1 P4.2 R20.1
NetC40_1: C40.1 C42.1 P3.5 R21.1
NetC41_1: C41.1 C43.1 P4.5 R22.1
NetC42_2: C42.2 C44.1 P3.6 R23.1
NetC43_2: C43.2 C45.1 P4.6 R24.1
NetC49_1: C49.1 L1.2 U8.2
NetC52_1: C52.1 R25.2 R26.1 R31.2
NetC53_2: C53.2 R28.2 R29.1 R32.2
NetC54_2: C54.2 R33.2 R34.1 R39.2
NetC55_2: C55.2 R36.2 R37.1 R40.2
NetC56_2: C56.2 R41.2 R42.1 R47.2
NetC57_2: C57.2 R44.2 R45.1 R48.2
NetC58_2: C58.2 R49.2 R50.1 R52.2
NetC59_2: C59.2 R53.2 R54.1 R56.2
NetC61_2: C61.2 D2.1 R57.1 R59.2 U17.2
NetC63_2: C63.2 D3.1 R60.1 R62.2 U18.2
NetC65_2: C65.2 D4.1 R63.1 R65.2 U19.2
NetC68_2: C68.2 R92.1 U21.18
NetD5_1: D5.1 R69.2
NetD6_1: D6.1 R70.2
NetD7_1: D7.1 R71.2
NetD8_1: D8.1 R72.2
NetD9_1: D9.1 R73.2
NetD10_1: D10.1 R74.2
NetD11_1: D11.1 R75.2
NetD12_1: D12.1 R76.2
NetJK1_3: JK1.3 JP2.2
NetJK1_4: JK1.4 JP2.1
NetJK1_5: JK1.5 JP2.3
NetJK2_3: JK2.3 JP3.2
NetJK2_4: JK2.4 JP3.1
NetJK2_5: JK2.5 JP3.3
NetJK3_3: JK3.3 JP4.2
NetJK3_4: JK3.4 JP4.1
NetJK3_5: JK3.5 JP4.3
NetJK4_3: JK4.3 JP5.2
NetJK4_4: JK4.4 JP5.1
NetJK4_5: JK4.5 JP5.3
NetJK5_3: JK5.3 JP8.2
NetJK5_4: JK5.4 JP8.1
NetJK5_5: JK5.5 JP8.3
NetJK6_3: JK6.3 JP9.2
NetJK6_4: JK6.4 JP9.1
NetJK6_5: JK6.5 JP9.3
NetJK7_3: JK7.3 JP7.2
NetJK7_4: JK7.4 JP7.1
NetJK7_5: JK7.5 JP7.3
NetJK8_3: JK8.3 JP6.2
NetJK8_4: JK8.4 JP6.1
NetJK8_5: JK8.5 JP6.3
NetOC1_1: OC1.1 R66.1
NetOC2_1: OC2.1 R68.1
NetOC3_1: OC3.1 R78.1
NetOC4_1: OC4.1 R80.1
NetOC5_1: OC5.1 R82.1
NetOC6_1: OC6.1 R84.1
NetOC7_1: OC7.1 R86.1
NetOC8_1: OC8.1 R88.1
NetQ1_1: Q1.1 Q2.2 U2.3
NetQ1_2: Q1.2 Q2.3 R3.2
NetQ1_3: Q1.3 R3.1 U2.2
NetR9_2: R9.2 U3.8
NetR10_2: R10.2 U4.8
NetR11_2: R11.2 R13.2 U3.6 U3.7
NetR12_2: R12.2 U4.7
NetR14_2: R14.2 U4.6
NetR15_2: R15.2 U3.5
NetR16_2: R16.2 U4.5
NetR17_2: R17.2 U5.8
NetR18_2: R18.2 U6.8
NetR19_2: R19.2 U5.7
NetR20_2: R20.2 U6.7
NetR21_2: R21.2 U5.6
NetR22_2: R22.2 U6.6
NetR23_2: R23.2 U5.5
NetR24_2: R24.2 U6.5
NetR26_2: R26.2 U9.1
NetR29_2: R29.2 U10.1
NetR34_2: R34.2 U11.1
NetR37_2: R37.2 U12.1
NetR42_2: R42.2 U13.1
NetR45_2: R45.2 U14.1
NetR50_2: R50.2 U15.1
NetR54_2: R54.2 U16.1
NetR90_1: R90.1 U21.13
NetR91_1: R91.1 U21.12
ON_OFF: P5.2
REGS: R5.2 R6.1 U2.4
RELY1: D5.2 JK1.1 U20.18
RELY2: D6.2 JK2.1 U20.17
RELY3: D7.2 JK3.1 U20.16
RELY4: D8.2 JK4.1 U20.15
RELY5: D9.2 JK8.1 U20.14
RELY6: D10.2 JK7.1 U20.13
RELY7: D11.2 JK5.1 U20.12
RELY8: D12.2 JK6.1 U20.11
SET: R7.2 U2.7
SNVS_TAMPER0: P5.3
SNVS_TAMPER2: P5.8
SNVS_TAMPER4: P5.1
SNVS_TAMPER5: P5.6
SNVS_TAMPER7: P5.5
SNVS_TAMPER8: P5.4
UAR4_RXD: P5.42
UART1_TXD: P5.12 P5.13
UART2_CTS: P5.20 U3.16 U4.16 U5.16 U6.16
UART2_RTS: P5.19 U3.15 U4.15 U5.15 U6.15
UART2_RXD: P5.18 U3.1 U4.1 U5.1 U6.1
UART2_TXD: P5.17 U3.2
UART3_CTS: P5.21
UART3_RTS: P5.22
UART3_RXD: P5.35
UART3_TXD: P5.33
UART4_TXD: P5.43
UART5_RXD: P5.44
UART5_TXD: P5.45
VCC: C10.1 C14.1 C30.1 C35.1 C48.1 C67.2 J1.16 R1.2 R2.2 R27.1 R30.1 R35.1 R38.1 R43.1 R46.1 R51.1 R55.1 R58.1 R61.1 R64.1 R66.2 R68.2 R78.2 R80.2 R82.2 R84.2 R86.2 R88.2 R90.2 R91.2 R92.2 U1.3 U3.14 U4.14 U5.14 U6.14 U7.3 U21.9 U21.17
VCC15V: C1.1 C2.2 D1.2 U2.1
Vout: R4.2 U1.1
X10: J1.1 R25.1 TVS1.2
X11: J1.2 R33.1 TVS3.2
X12: J1.3 R41.1 TVS5.2
X13: J1.4 R49.1 TVS7.2
X14: J1.5 R28.1 TVS2.2
X15: J1.6 R36.1 TVS4.2
X16: J1.7 R44.1 TVS6.2
X17: J1.8 R53.1 TVS8.2
XC00: R58.2 U17.8
XC01: R61.2 U18.8
XC02: R64.2 U19.8
Z: C65.1 D4.2 J1.13 R65.1 TVS11.1 U19.3
pads on no net: C60.1 C60.2 C62.1 C62.2 C64.1 C64.2 J1.10 JK5.2 JK6.2 JK7.2 JK8.2 P5.23 P5.24 P5.25 U2.8 U3.3 U3.4 U4.3 U4.4 U5.3 U5.4 U6.3 U6.4 U17.7 U18.7 U19.7 U21.11 U21.14 U21.19 U21.20

## Text inside footprints (layer, text, board x,y; h text height)
C1: Top Overlay "+" at 10180.15,2010.99 h59.06
P5: Top Overlay "2" at 7125,2515 h50 r90; Top Overlay "1" at 7225,2515 h50 r90; Top Overlay "48" at 7125,4995 h50 r90; Top Overlay "47" at 7225,4995 h50 r90
Q2: Top Overlay "3" at 8349.57,2167.72 h59.05; Top Overlay "1" at 8349.57,2266.85 h59.05
U21: Top Overlay "*" at 12789.67,9368.34 h50; Mechanical 13 "*" at 12847.26,9343.69 h50